# EAGLE board MLH_Flamable_Gas_Detector (EAGLE 9.7.0)

Size 220.33 x 182.98 mm. Coordinates in mm from the lower left corner, seen from the top.
Outline: 0,0 220.34,0 220.34,182.99 0,182.99 0,0
Copper layers (1*16): Top 0.035mm / dielectric 1.5mm / Bottom 0.035mm
Design rules "default": minimum track width 6mil, minimum drill 0.35mm, track to track 6mil, track to pad 6mil, pad to pad 6mil, via to via 6mil, smd to smd 6mil, copper to edge 40mil, drill to drill 6mil, minimum pad ring 10mil, minimum via ring 8mil, stop-mask expansion 4mil, vias tented up to drill 0mil, thermal gap 10mil

## Footprints (pad centres in the part's own frame; a part is rotated, then mirrored left to right if it is on the bottom)
LEDRD254W60D565H860B_G = drill 0.981 pad 1.581: 1 -1.27,0; 2 1.27,0
LEDRD254W60D565H860B = drill 0.981 pad 1.581: 1 -1.27,0; 2 1.27,0
MQ-XX-SOCKET = drill 1.27: 1 -6.223,6.223; 2 -8.788,0; 3 -6.223,-6.223; 4 6.223,-6.223; 5 8.788,0; 6 6.223,6.223
PIEZO = drill 1 pad 1.6: 1 -3.5,0; 2 3.5,0
RESAD1016W63L850D250B = drill 0.83 pad 1.43: 1 -5.08,0; 2 5.08,0
ARDUINO-UNO-R3-SHIELD = drill 1.016 pad 1.88: 3.3V 24.13,-2.54; 5V 24.13,0; A0 24.13,12.7; A1 24.13,15.24; A2 24.13,17.78; A3 24.13,20.32; A4 24.13,22.86; A5 24.13,25.4; AREF -24.13,-13.97; D2 -24.13,20.32; D3 -24.13,17.78; D4 -24.13,15.24; D5 -24.13,12.7; D6 -24.13,10.16; D7 -24.13,7.62; D8 -24.13,3.81; D9 -24.13,1.27; D10 -24.13,-1.27; D11 -24.13,-3.81; D12 -24.13,-6.35; D13 -24.13,-8.89; GND@0 24.13,2.54; GND@1 24.13,5.08; GND@2 -24.13,-11.43; IOREF 24.13,-7.62; NC 24.13,-10.16; RES 24.13,-5.08; RX -24.13,25.4; SCL -24.13,-19.05; SDA -24.13,-16.51; TX -24.13,22.86; VIN 24.13,7.62
JHD-162A = drill 1.016 long: 1 -19.05,0; 2 -16.51,0; 3 -13.97,0; 4 -11.43,0; 5 -8.89,0; 6 -6.35,0; 7 -3.81,0; 8 -1.27,0; 9 1.27,0; 10 3.81,0; 11 6.35,0; 12 8.89,0; 13 11.43,0; 14 13.97,0; 15 16.51,0; 16 19.05,0

## Placement (x,y rotation side)
D1  GREEN  [LEDRD254W60D565H860B_G]  183.79,109.95 180 top
D2  RED  [LEDRD254W60D565H860B]  160.93,109.95 180 top
D3  RED  [LEDRD254W60D565H860B]  145.69,92.17 180 top
D4  RED  [LEDRD254W60D565H860B]  145.69,89.63 180 top
D5  RED  [LEDRD254W60D565H860B]  145.69,87.09 180 top
D6  RED  [LEDRD254W60D565H860B]  145.69,84.55 180 top
D7  RED  [LEDRD254W60D565H860B]  150.77,89.63 180 top
D8  RED  [LEDRD254W60D565H860B]  160.93,89.63 180 top
D9  RED  [LEDRD254W60D565H860B]  160.93,92.17 180 top
D10  RED  [LEDRD254W60D565H860B]  160.93,87.09 180 top
D11  RED  [LEDRD254W60D565H860B]  160.93,84.55 180 top
D12  RED  [LEDRD254W60D565H860B]  171.09,92.17 180 top
D13  RED  [LEDRD254W60D565H860B]  171.09,89.63 180 top
D14  RED  [LEDRD254W60D565H860B]  176.17,92.17 180 top
D15  RED  [LEDRD254W60D565H860B]  181.25,92.17 180 top
D16  RED  [LEDRD254W60D565H860B]  181.25,89.63 180 top
D17  RED  [LEDRD254W60D565H860B]  171.09,84.55 180 top
D18  RED  [LEDRD254W60D565H860B]  181.25,87.09 180 top
D19  RED  [LEDRD254W60D565H860B]  171.09,87.09 180 top
D20  RED  [LEDRD254W60D565H860B]  181.25,84.55 180 top
D21  RED  [LEDRD254W60D565H860B]  176.17,84.55 180 top
D22  RED  [LEDRD254W60D565H860B]  191.41,92.17 180 top
D23  RED  [LEDRD254W60D565H860B]  196.49,92.17 180 top
D24  RED  [LEDRD254W60D565H860B]  201.57,92.17 180 top
D26  RED  [LEDRD254W60D565H860B]  196.49,89.63 180 top
D27  RED  [LEDRD254W60D565H860B]  196.49,87.09 180 top
D28  RED  [LEDRD254W60D565H860B]  196.49,84.55 180 top
D29  RED  [LEDRD254W60D565H860B]  155.85,87.09 180 top
D30  GREEN  [LEDRD254W60D565H860B_G]  183.79,107.41 180 top
D31  GREEN  [LEDRD254W60D565H860B_G]  188.87,112.49 180 top
D32  GREEN  [LEDRD254W60D565H860B_G]  188.87,104.87 180 top
D33  GREEN  [LEDRD254W60D565H860B_G]  193.95,109.95 180 top
D34  GREEN  [LEDRD254W60D565H860B_G]  193.95,107.41 180 top
D35  GREEN  [LEDRD254W60D565H860B_G]  204.11,112.49 180 top
D36  GREEN  [LEDRD254W60D565H860B_G]  204.11,109.95 180 top
D37  GREEN  [LEDRD254W60D565H860B_G]  204.11,107.41 180 top
D38  GREEN  [LEDRD254W60D565H860B_G]  204.11,104.87 180 top
D39  GREEN  [LEDRD254W60D565H860B_G]  209.19,109.95 180 top
D40  GREEN  [LEDRD254W60D565H860B_G]  214.27,112.49 180 top
D41  GREEN  [LEDRD254W60D565H860B_G]  209.19,107.41 180 top
D42  GREEN  [LEDRD254W60D565H860B_G]  214.27,104.87 180 top
GAS1  GAS-SENSORMQ-XX-SOCKET  [MQ-XX-SOCKET]  96.78,146.73 270 top
PIEZO1  PIEZO  [PIEZO]  158.28,169.4 0 top
R1  1k  [RESAD1016W63L850D250B]  184.26,135.48 0 top
R2  4.7k  [RESAD1016W63L850D250B]  117.67,134.87 0 top
R3  220  [RESAD1016W63L850D250B]  154.58,107.41 0 top
R4  221  [RESAD1016W63L850D250B]  177.44,104.87 0 top
R5  1k  [RESAD1016W63L850D250B]  168.97,47.07 0 top
U1  ARDUINO-UNO-R3-SHIELD  [ARDUINO-UNO-R3-SHIELD]  47.88,88.83 270 top
U2  LCD-16X2JHD-162A  [JHD-162A]  106.93,36.63 0 top

## Library data of the parts
D1 D30-D42 = Tinkercad; CATEGORY: Opto-Electronic; SUB-CATEGORY: LED; VALUE: LED_GREEN
D2-D24 D26-D29 = Tinkercad; CATEGORY: Opto-Electronic; SUB-CATEGORY: LED; VALUE: LED_RED
GAS1 PIEZO1 R1-R5 U1 U2 = Tinkercad

## Nets
D1_C: D1.2 D30.2 D31.2 D32.2 D33.2 D34.2 D35.2 D36.2 D37.2 D38.2 D39.2 D40.2 D41.2 D42.2 R4.2
D2_C: D2.2 D3.2 D4.2 D5.2 D6.2 D7.2 D8.2 D9.2 D10.2 D11.2 D12.2 D13.2 D14.2 D15.2 D16.2 D17.2 D18.2 D19.2 D20.2 D21.2 D22.2 D23.2 D24.2 D26.2 D27.2 D28.2 D29.2 R3.2
PIEZO1_2: PIEZO1.2 R1.1
U1_5V: GAS1.1 GAS1.2 GAS1.3 R5.2 U1.5V U2.2
U1_A0: GAS1.4 GAS1.6 R2.1 U1.A0
U1_D2: D2.1 D3.1 D4.1 D5.1 D6.1 D7.1 D8.1 D9.1 D10.1 D11.1 D12.1 D13.1 D14.1 D15.1 D16.1 D17.1 D18.1 D19.1 D20.1 D21.1 D22.1 D23.1 D24.1 D26.1 D27.1 D28.1 D29.1 U1.D2
U1_D3: D1.1 D30.1 D31.1 D32.1 D33.1 D34.1 D35.1 D36.1 D37.1 D38.1 D39.1 D40.1 D41.1 D42.1 U1.D3
U1_D4: PIEZO1.1 U1.D4
U1_D5: U1.D5 U2.4
U1_D6: U1.D6 U2.6
U1_D8: U1.D8 U2.11
U1_D9: U1.D9 U2.12
U1_D10: U1.D10 U2.13
U1_D11: U1.D11 U2.14
U1_GND: GAS1.5 R1.2 R2.2 R3.1 R4.1 U1.GND@0 U1.GND@1 U1.GND@2 U2.1 U2.3 U2.5 U2.16
U2_LED+: R5.1 U2.15

## Tracks (layer width: path | path; a pad name or v marks a point on that pad's centre or on a via)
D1_C  (14 unrouted)
D2_C  (27 unrouted)
PIEZO1_2  (1 unrouted)
U1_5V  (5 unrouted)
U1_A0  (3 unrouted)
U1_D2  (27 unrouted)
U1_D3  (14 unrouted)
U1_D4  (1 unrouted)
U1_D5  (1 unrouted)
U1_D6  (1 unrouted)
U1_D8  (1 unrouted)
U1_D9  (1 unrouted)
U1_D10  (1 unrouted)
U1_D11  (1 unrouted)
U1_GND  (11 unrouted)
U2_LED+  (1 unrouted)